# Altium PCB PressureTransducer.PcbDoc
Units mil, origin at the board's own origin, x right, y up, seen from the top; angles counter-clockwise.
Board outline 6000 x 2595 mil, 2 copper layers (Top Layer, Bottom Layer); 66 components, 37 nets, 268 pads, 45 vias.
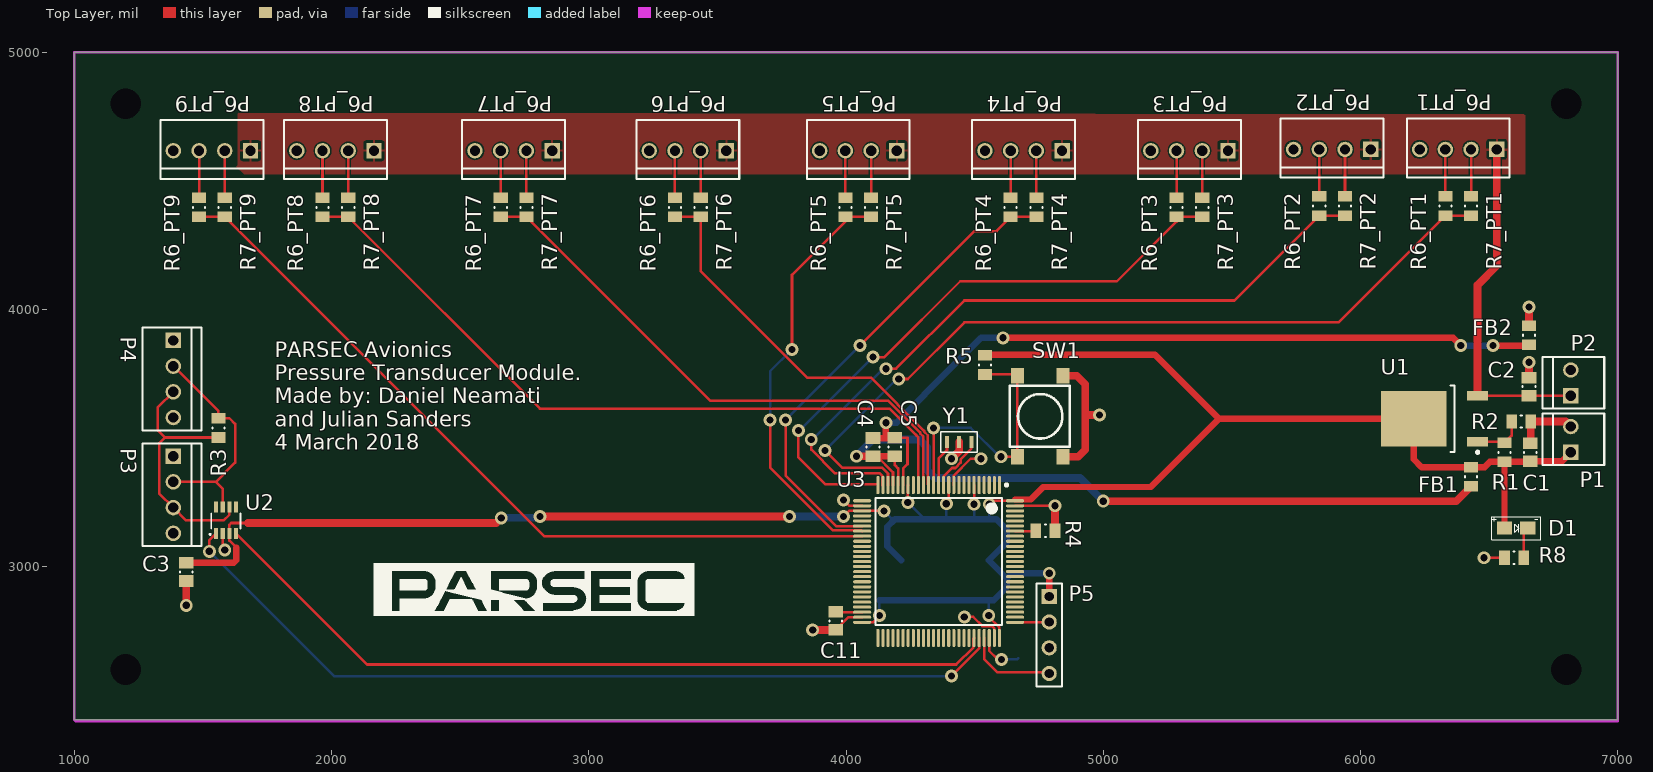
[diagram p0: Top Layer view]
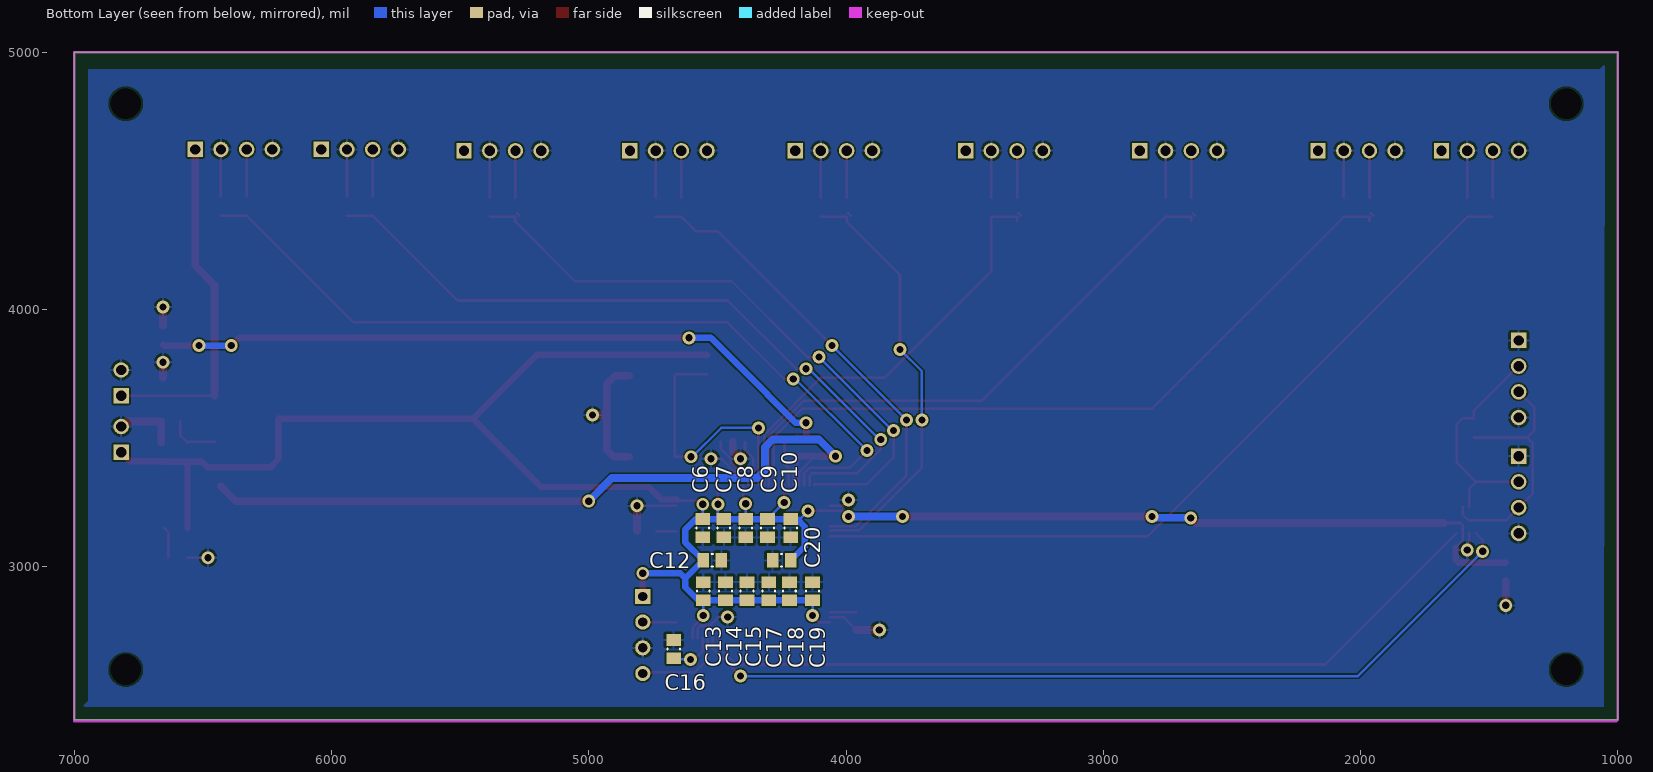
[diagram p1: Bottom Layer view, seen from below]
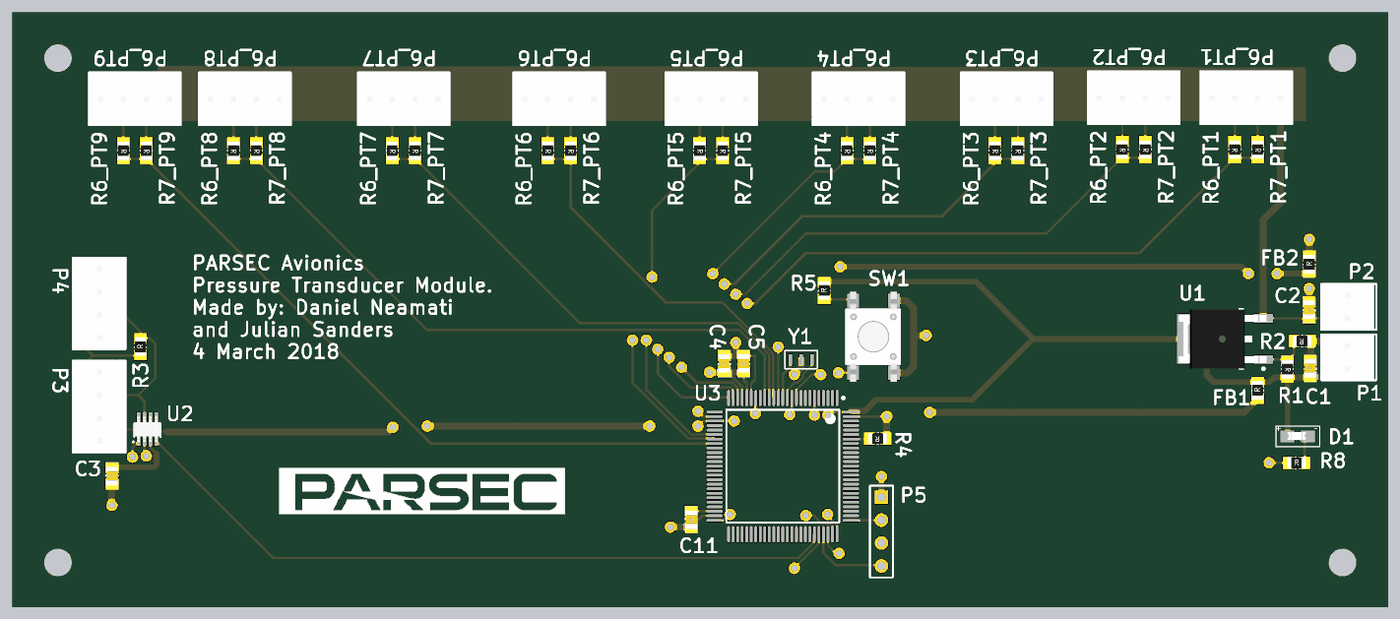
[diagram p2: 3D render of the assembled board from above, using the file's embedded part models]
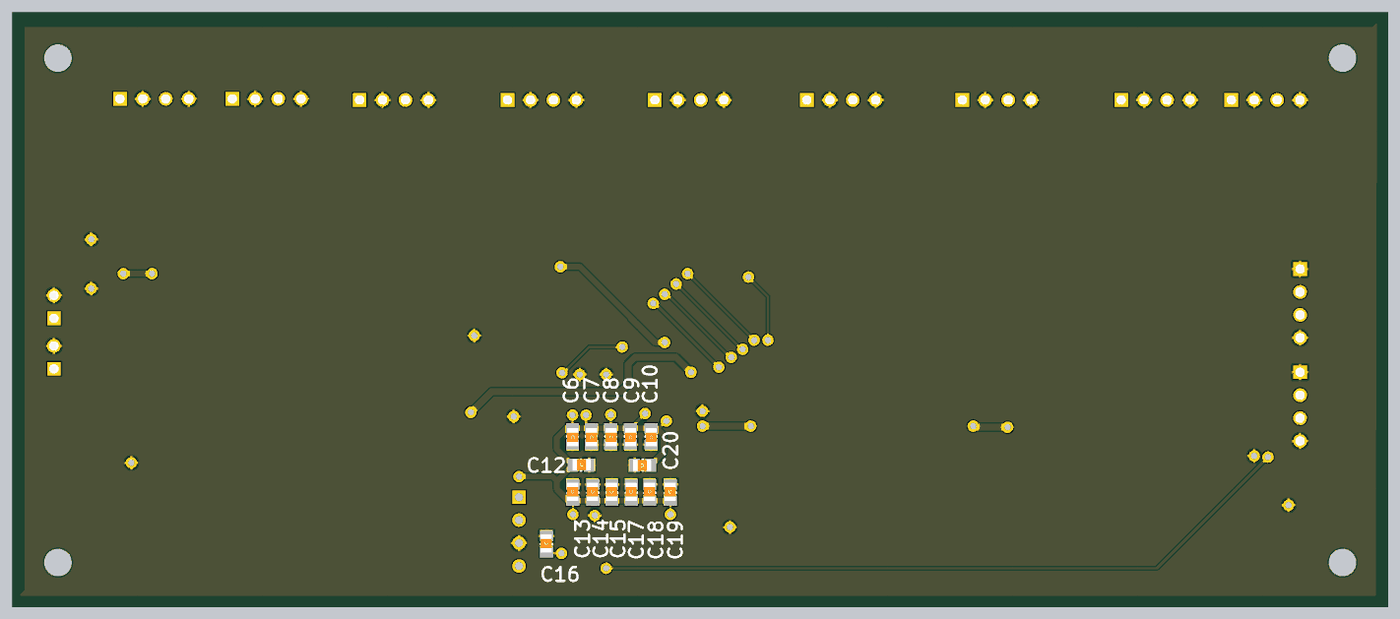
[diagram p3: 3D render of the assembled board from below, using the file's embedded part models]

## Layer stack, top to bottom
Top Solder: solder mask 0.4, Solder Resist, Dk 3.5
Top Layer: signal copper 1.4
Dielectric 1: dielectric 12.6, FR-4, Dk 4.8
Bottom Layer: signal copper 1.4
Bottom Solder: solder mask 0.4, Solder Resist, Dk 3.5

## Board outline
1000,2405 7000,2405 7000,5000 1000,5000

## Design rules (kind name [scope] priority, off if disabled: settings)
Clearance [All] p1: gap=6 ignorepadtopadclearanceinfootprint=FALSE
HoleSize [All] p1: absolutevalues=TRUE maxlimit=250 minlimit=1 maxpercent=80.000 minpercent=20.000
MinimumSolderMaskSliver [All] p1: minsoldermaskwidth=0
PolygonConnect [All] p1: connectstyle=Relief reliefconductorwidth=10 reliefentries=4 polygonreliefangle="90 Angle" airgapwidth=10
RoomDefinition Micro_Schematic [InComponentClass('Micro_Schematic')] p1: confinementstyle=ConfineIn formatcopy=TRUE lockcomponents=FALSE outline 1130,3975 1130,2480 5041.49,2480 5041.49,3975
RoomDefinition U_Power [InComponentClass('U_Power')] p2: confinementstyle=ConfineIn formatcopy=TRUE lockcomponents=FALSE outline 6042.68,2935 6957.44,2935 6957.44,3985 6042.68,3985
RoomDefinition PT9 [InComponentClass('PT9')] p3: confinementstyle=ConfineIn formatcopy=TRUE lockcomponents=FALSE outline 1740,4127.4 1740,4862.4 1315,4862.4 1315,4127.4
RoomDefinition PT8 [InComponentClass('PT8')] p4: confinementstyle=ConfineIn formatcopy=TRUE lockcomponents=FALSE outline 2220,4127.4 2220,4862.4 1795,4862.4 1795,4127.4
RoomDefinition PT7 [InComponentClass('PT7')] p5: confinementstyle=ConfineIn formatcopy=TRUE lockcomponents=FALSE outline 2912.6,4127.4 2912.6,4862.4 2487.6,4862.4 2487.6,4127.4
RoomDefinition PT6 [InComponentClass('PT6')] p6: confinementstyle=ConfineIn formatcopy=TRUE lockcomponents=FALSE outline 3590,4127.4 3590,4862.4 3165,4862.4 3165,4127.4
RoomDefinition PT5 [InComponentClass('PT5')] p7: confinementstyle=ConfineIn formatcopy=TRUE lockcomponents=FALSE outline 4252.6,4127.4 4252.6,4862.4 3827.6,4862.4 3827.6,4127.4
RoomDefinition PT4 [InComponentClass('PT4')] p8: confinementstyle=ConfineIn formatcopy=TRUE lockcomponents=FALSE outline 4895,4127.4 4895,4862.4 4470,4862.4 4470,4127.4
RoomDefinition PT3 [InComponentClass('PT3')] p9: confinementstyle=ConfineIn formatcopy=TRUE lockcomponents=FALSE outline 5540,4127.4 5540,4862.4 5115,4862.4 5115,4127.4
RoomDefinition PT2 [InComponentClass('PT2')] p10: confinementstyle=ConfineIn formatcopy=TRUE lockcomponents=FALSE outline 6095,4132.4 6095,4867.4 5670,4867.4 5670,4132.4
RoomDefinition PT1 [InComponentClass('PT1')] p11: confinementstyle=ConfineIn formatcopy=TRUE lockcomponents=FALSE outline 6585,4132.4 6585,4867.4 6160,4867.4 6160,4132.4
RoutingVias [All] p1: holewidth=28 width=50 viastyle="Through Hole" minholewidth=28 minwidth=50 maxholewidth=28 maxwidth=50
SilkToSilkClearance [All] p1: silktosilkclearance=5
SilkToSolderMaskClearance [IsPad] p1: minsilkscreentomaskgap=1 clearancetoexposedcopper=TRUE
SolderMaskExpansion [All] p1: expansion=4
Width [All] p1: maxlimit=100 minlimit=6 preferedwidth=10
26 further rules are at their usual default settings.

## Classes and differential pairs
channel class Pressure_Transducer: PT1 PT2 PT3 PT4 PT5 PT6 PT7 PT8 PT9
component class U_Power: C1 C2 D1 FB1 FB2 P1 P2 R1 R2 R8 U1
component class PT9: P6_PT9 R6_PT9 R7_PT9
component class PT8: P6_PT8 R6_PT8 R7_PT8
component class PT7: P6_PT7 R6_PT7 R7_PT7
component class PT6: P6_PT6 R6_PT6 R7_PT6
component class PT5: P6_PT5 R6_PT5 R7_PT5
component class PT4: P6_PT4 R6_PT4 R7_PT4
component class PT3: P6_PT3 R6_PT3 R7_PT3
component class PT2: P6_PT2 R6_PT2 R7_PT2
component class PT1: P6_PT1 R6_PT1 R7_PT1
component class Micro_Schematic: C3 C4 C5 C6 C7 C8 C9 C10 C11 C12 C13 C14 C15 C16 C17 C18 C19 C20 P3 P4 P5 R3 R4 R5 SW1 U2 U3 Y1

## Components (designator, comment, footprint, x,y, rotation, side; value= is the part's Value field where it differs from the comment)
C1 "1.0uF" C0805 6660,3445 r90 top
C2 "0.1uF" C0805 6655,3700 r90 top
C3 "100n" C0805 1435,2980 r270 top
C4 "100n" C0805 4105,3465 r90 top
C5 "1u" C0805 4190,3465.43 r90 top
C6 "100n" C0805 4556.85,3150 r270 bottom
C7 "100n" C0805 4475,3150 r270 bottom
C8 "100n" C0805 4390,3150 r270 bottom
C9 "100n" C0805 4305,3150 r270 bottom
C10 "4u7" C0805 4215,3150 r270 bottom
C11 "2u2" C0805 3960,2790 r270 top
C12 "100n" C0805 4520,3025 r180 bottom
C13 "100n" C0805 4555,2905 r90 bottom
C14 "100n" C0805 4468.43,2905 r90 bottom
C15 "100n" C0805 4385,2905 r90 bottom
C16 "2u2" C0805 4670,2680 r90 bottom
C17 "100n" C0805 4300,2905 r90 bottom
C18 "100n" C0805 4220,2905 r90 bottom
C19 "100n" C0805 4130,2905 r90 bottom
C20 "100n" C0805 4250,3025 r0 bottom
D1 "LED" 0805LED 6560,3150 r0 top
FB1 "FERRITE" R0805 6430,3350 r90 top
FB2 "FERRITE" R0805 6655,3900 r90 top
P1 "Molex KK 1x2" "Molex KK 2x1" 6817.68,3495 r180 top
P2 "Molex KK 1x2" "Molex KK 2x1" 6817.68,3715 r180 top
P3 "Molex KK 1x4" "Molex KK 4x1" 1385,3230 r0 top
P4 "Molex KK 1x4" "Molex KK 4x1" 1385,3680 r0 top
P5 "Header 4" HDR1X4 4790,2885 r270 top
P6_PT1 "Molex KK 1x4" "Molex KK 4x1" 6330,4622.4 r270 top (schematic designator P6)
P6_PT2 "Molex KK 1x4" "Molex KK 4x1" 5840,4622.4 r270 top (schematic designator P6)
P6_PT3 "Molex KK 1x4" "Molex KK 4x1" 5285,4617.4 r270 top (schematic designator P6)
P6_PT4 "Molex KK 1x4" "Molex KK 4x1" 4640,4617.4 r270 top (schematic designator P6)
P6_PT5 "Molex KK 1x4" "Molex KK 4x1" 3997.6,4617.4 r270 top (schematic designator P6)
P6_PT6 "Molex KK 1x4" "Molex KK 4x1" 3335,4617.4 r270 top (schematic designator P6)
P6_PT7 "Molex KK 1x4" "Molex KK 4x1" 2657.6,4617.4 r270 top (schematic designator P6)
P6_PT8 "Molex KK 1x4" "Molex KK 4x1" 1965,4617.4 r270 top (schematic designator P6)
P6_PT9 "Molex KK 1x4" "Molex KK 4x1" 1485,4617.4 r270 top (schematic designator P6)
R1 "240R" R0805 6560,3445 r270 top
R2 "390R" R0805 6625,3565 r180 top
R3 "120R" R0805 1560,3540 r90 top
R4 "100R" R0805 4775,3140 r180 top
R5 "1k" R0805 4540,3785 r90 top
R6_PT1 "240R" R0805 6330,4402.4 r270 top (schematic designator R6)
R6_PT2 "240R" R0805 5840,4402.4 r270 top (schematic designator R6)
R6_PT3 "240R" R0805 5285,4397.4 r270 top (schematic designator R6)
R6_PT4 "240R" R0805 4640,4397.4 r270 top (schematic designator R6)
R6_PT5 "240R" R0805 3997.6,4397.4 r270 top (schematic designator R6)
R6_PT6 "240R" R0805 3335,4397.4 r270 top (schematic designator R6)
R6_PT7 "240R" R0805 2657.6,4397.4 r270 top (schematic designator R6)
R6_PT8 "240R" R0805 1965,4397.4 r270 top (schematic designator R6)
R6_PT9 "240R" R0805 1485,4397.4 r270 top (schematic designator R6)
R7_PT1 "464R" R0805 6430,4402.4 r270 top (schematic designator R7)
R7_PT2 "464R" R0805 5940,4402.4 r270 top (schematic designator R7)
R7_PT3 "464R" R0805 5385,4397.4 r270 top (schematic designator R7)
R7_PT4 "464R" R0805 4740,4397.4 r270 top (schematic designator R7)
R7_PT5 "464R" R0805 4097.6,4397.4 r270 top (schematic designator R7)
R7_PT6 "464R" R0805 3435,4397.4 r270 top (schematic designator R7)
R7_PT7 "464R" R0805 2757.6,4397.4 r270 top (schematic designator R7)
R7_PT8 "464R" R0805 2065,4397.4 r270 top (schematic designator R7)
R7_PT9 "464R" R0805 1585,4397.4 r270 top (schematic designator R7)
R8 "1k" R0805 6597.4,3035 r0 top
SW1 "Push Switch" PUSHBUTTON 4755,3585 r90 top
U1 "LM317" D-PAK 6287.68,3575.24 r180 top
U2 "TCAN332DCNT" SOT-23-8 1590,3181.18 r0 top
U3 "MC-ARM-STM32F446-LQFP100" STM-LQFP100_N 4360,3020.43 r270 top
Y1 "CSTCE8M00" "8MHz Ceramic Resonator" 4392.76,3485 r0 top

## Footprints (in the part's own frame and the unit in brackets; to place one, negate y for a bottom-side part, rotate by r counter-clockwise, add the part's x,y. Pads: shape width x height; smd on the part's side, far side on the other; paste and mask are expansions set on the pad)
"8MHz Ceramic Resonator" [mm] "8MHz Ceramic Resonator Murata"
  rect 0.4x1.2 smd: 1(0,0) 2(1.2,0) 3(2.4,0)
  silkscreen extent -0.6,-1 3,1
0805LED [mil]
  rect 60x50 smd: A(0,0) K(90,0)
  silkscreen extent -50,-45 140,45, body extent -1,-16 81,20, height 33
C0805 [mm] "Chip Capacitor, Body 2.0x1.2mm, Height 0.75mm, IPC Medium Density"
  rect 1.15x1.45 smd: 1(-0.9,0) 2(0.9,0)
  silkscreen extent -0.05,-0.62 0.05,0.63, body extent -1.42,-0.67 1.58,0.73, height 0.93
D-PAK [mm] "D-PAK, 4-Leads, Body 6.1x6.5mm, Pitch 2.28mm, Lead Span 9.7mm, IPC Medium Density"
  rect 2.1x0.95 smd: 1(-4.25,2.28) 3(-4.25,-2.28)
  rect 6.5x5.5 smd: 4(2.05,0)
  silkscreen extent -4.38,-3.3 -1.6,3.43, body extent -4.6,-3.28 5.1,3.3, height 2.3
HDR1X4 [mm] "Connector; Header; 4 Position"
  rect 1.5x1.5 hole 0.9: 1(0,0)
  round 1.5 hole 0.9: 2(2.54,0) 3(5.08,0) 4(7.62,0)
  silkscreen extent -1.27,-1.27 8.89,1.27
"Molex KK 2x1" [mil]
  rect 60x60 hole 40: 1(0,50)
  round 60 hole 40: 2(0,-50)
  silkscreen extent -130,-100 110,100, body extent -120,-100 110,100, height 458
"Molex KK 4x1" [mil]
  rect 60x60 hole 40: 1(0,200)
  round 60 hole 40: 2(0,100) 3(0,0) 4(0,-100)
  silkscreen extent -120,-150 110,250, body extent -120,-150 110,250, height 458
PUSHBUTTON [mm]
  rect 1.55x1.3 smd: 1(-4,2.25) 1(4,2.25) 2(-4,-2.25) 2(4,-2.25)
  silkscreen extent -3,-2.9 3,3, body extent -5,-3 5,3, height 5.12
R0805 [mm] "Chip Resistor, Body 2.0x1.3mm, IPC Medium Density"
  rect 1.05x1.4 smd: 1(-0.95,0) 2(0.95,0)
  silkscreen extent -0.05,-0.6 0.05,0.6, body extent -1.46,-0.7 1.54,0.7, height 0.53
SOT-23-8 [mm] "SOT-23-8"
  rect 0.4x1.1 smd: 1(-0.975,-1.3) 2(-0.325,-1.3) 3(0.325,-1.3) 4(0.975,-1.3) 5(0.975,1.3) 6(0.325,1.3) 7(-0.325,1.3) 8(-0.975,1.3)
  silkscreen extent -1.65,-1.48 1.44,0.65, body extent -1.5,-1.4 1.5,1.4, height 1.11
STM-LQFP100_N [mm] "Thin QFP, 100-Leads, Body 14x14mm, Pitch 0.5mm, IPC Medium Density"
  oval 1.8x0.3 smd: 1(-7.55,6) 2(-7.55,5.5) 3(-7.55,5) 4(-7.55,4.5) 5(-7.55,4) 6(-7.55,3.5) 7(-7.55,3) 8(-7.55,2.5) 9(-7.55,2) 10(-7.55,1.5) 11(-7.55,1) 12(-7.55,0.5) 13(-7.55,0) 14(-7.55,-0.5) 15(-7.55,-1) 16(-7.55,-1.5) 17(-7.55,-2) 18(-7.55,-2.5) 19(-7.55,-3) 20(-7.55,-3.5) 21(-7.55,-4) 22(-7.55,-4.5) 23(-7.55,-5) 24(-7.55,-5.5) 25(-7.55,-6) 51(7.55,-6) 52(7.55,-5.5) 53(7.55,-5) 54(7.55,-4.5) 55(7.55,-4) 56(7.55,-3.5) 57(7.55,-3) 58(7.55,-2.5) 59(7.55,-2) 60(7.55,-1.5) 61(7.55,-1) 62(7.55,-0.5) 63(7.55,0) 64(7.55,0.5) 65(7.55,1) 66(7.55,1.5) 67(7.55,2) 68(7.55,2.5) 69(7.55,3) 70(7.55,3.5) 71(7.55,4) 72(7.55,4.5) 73(7.55,5) 74(7.55,5.5) 75(7.55,6)
  oval 0.3x1.8 smd: 26(-6,-7.55) 27(-5.5,-7.55) 28(-5,-7.55) 29(-4.5,-7.55) 30(-4,-7.55) 31(-3.5,-7.55) 32(-3,-7.55) 33(-2.5,-7.55) 34(-2,-7.55) 35(-1.5,-7.55) 36(-1,-7.55) 37(-0.5,-7.55) 38(0,-7.55) 39(0.5,-7.55) 40(1,-7.55) 41(1.5,-7.55) 42(2,-7.55) 43(2.5,-7.55) 44(3,-7.55) 45(3.5,-7.55) 46(4,-7.55) 47(4.5,-7.55) 48(5,-7.55) 49(5.5,-7.55) 50(6,-7.55) 76(6,7.55) 77(5.5,7.55) 78(5,7.55) 79(4.5,7.55) 80(4,7.55) 81(3.5,7.55) 82(3,7.55) 83(2.5,7.55) 84(2,7.55) 85(1.5,7.55) 86(1,7.55) 87(0.5,7.55) 88(0,7.55) 89(-0.5,7.55) 90(-1,7.55) 91(-1.5,7.55) 92(-2,7.55) 93(-2.5,7.55) 94(-3,7.55) 95(-3.5,7.55) 96(-4,7.55) 97(-4.5,7.55) 98(-5,7.55) 99(-5.5,7.55) 100(-6,7.55)
  silkscreen extent -7.67,-6.25 6.25,6.83, body extent -7,-7 7,7, height 1.6

## Part data
C1 C2 C3 C4 C5 C6 C7 C8 C9 C10 C11 C12 C13 C14 C15 C16 C17 C18 C19 C20: library part C0805, "0805 Capacitor"
D1: Manufacturer="OSRAM Opto Semiconductors Inc", Manufacturer Part Number="LS T676-Q1R2-1-Z", Reel=D13
FB1 FB2: "FERRITE BEAD 0805"
P1 P2: "1x2 Molex KK Connector"
P3 P4 P6_PT1 P6_PT2 P6_PT3 P6_PT4 P6_PT5 P6_PT6 P6_PT7 P6_PT8 P6_PT9: "1x4 Molex KK Connector"
P5: "Header, 4-Pin", LatestRevisionDate=17-Jul-2002, LatestRevisionNote="Re-released for DXP Platform.", Publisher="Altium Limited"
R1 R2 R3 R4 R5 R6_PT1 R6_PT2 R6_PT3 R6_PT4 R6_PT5 R6_PT6 R6_PT7 R6_PT8 R6_PT9 R7_PT1 R7_PT2 R7_PT3 R7_PT4 R7_PT5 R7_PT6 R7_PT7 R7_PT8 R7_PT9 R8: library part R0805, "RESISTOR 0805"
SW1: library part PUSHBUTTON
U1: "Linear Voltage Regulator"
U2: "IC TXRX CAN 3.3V SOT23-8"
Y1: "8MHz Ceramic Resonator"

## Free pads (board coordinates)
  round 60 hole 120: 2(1200,4800) 3(1200,2600) 4(6800,2600) 5(6800,4800)

## Via types
v1: diameter 50, hole 28, Top Layer to Bottom Layer, 45 vias

## Nets (pads, with @x,y where several pads share a name; then routed paths per layer and width w, separated by ;. In a path a pad name is that pad's centre, name@x,y a point inside that pad or via, vN(x,y) a via of type N, cw(c..) or ccw(c..) an arc to the next point about the centre after c; other vN are vias at no path point)
3V3_AVDD: C4.1 C5.1 FB1.1 U3.21 U3.22 | length 2997.7
  Top Layer w10: C4.1 4120.43,3429.57 4182.83,3367.17 U3.22 ; C5.1@4189.57,3429.57 C5.1 4190,3395 4202.52,3382.48 U3.21
  Top Layer w25: C4.1@4120.43,3429.57 C5.1@4189.57,3429.57
  Top Layer w30: v1(4040.43,3429.57) C4.1 ; v1(5000,3255) 6372.4,3255 FB1.1
  Bottom Layer w30: v1(4040.43,3429.57) 4105.87,3495 4285,3495 4315,3465 4315,3375 4345,3345 4910,3345 v1(5000,3255)
3V3_DVDD: C1.1 C3.1 C6.1 C7.1 C8.1 C9.1 C10.1 C12.1 C13.1 C14.1 C15.1 C17.1 C18.1 C19.1 C20.1 D1.A FB1.2 P1.1 P5.1 R1.2 R5.2 U1.4 U2.3 U3.6 U3.11 U3.19 U3.28 U3.50 U3.75 U3.100 | length 9329.5
  Top Layer w10: 1630,3075 1602.8,3102.2 U2.3 1602.8,3162.8 1610,3170 1675,3170 ; 2640,3170 v1(2660,3190) ; v1(3990,3195) 4012.28,3217.28 U3.28 v1(4147.72,3217.28) ; U3.50 4104.21,2784.21 v1(4130,2810) ; v1(4240.43,3250) 4240.43,3316.22 U3.19 ; v1(4390,3245) 4399.37,3254.37 U3.11 ; v1(4497.8,3243.07) U3.6 ; v1(4555,2810) 4555,2805 4596.22,2763.78 U3.75 ; v1(4556.85,3243.15) 4570.35,3256.65 U3.100
  Top Layer w25: C3.1 1620.43,3015.43 1630,3025 1630,3075 ; R5.2 4542.6,3825 5200.47,3825 5450.24,3575.24 ; U3.100@4657.24,3261.37 4717.89,3261.37 4766.52,3310 5185,3310 5450.24,3575.24 ; P5.1 v1(4790,2975) ; D1.A R1.2 ; P1.1 6782.24,3409.57 C1.1 6658.03,3407.6 R1.2 ; 5450.24,3575.24 U1.4 6206.97,3418.03 6237.6,3387.4 FB1.2 6482.4,3387.4 6502.6,3407.6 R1.2
  Top Layer w30: 1675,3170 2640,3170 ; v1(2810,3195) v1(3780,3195)
  Bottom Layer w10: v1@2805,3190 v1(2810,3195) ; v1(4130,2810) C19.1 ; v1(4147.72,3217.28) 4179.57,3185.43 C10.1@4190.43,3185.43 ; v1(4240.43,3250) C9.1 ; C8.1 v1(4390,3245) ; C7.1@4495,3186.3 4497.8,3189.09 v1(4497.8,3243.07) ; v1(4555,2810) C13.1 ; C6.1 v1(4556.85,3243.15)
  Bottom Layer w25: C19.1 C18.1 C17.1 C15.1 C14.1 C13.1 4574.57,2869.57 4625,2920 4625,2955.43 ; C20.1 4160,3079.57 4160,3155 4190.43,3185.43 C10.1 C9.1 C8.1 C7.1 C6.1 4584.57,3185.43 4625,3145 4625,3094.57 C12.1 4625,2955.43 ; v1(4790,2975) 4644.57,2975 4625,2955.43
  Bottom Layer w30: v1(2660,3190) v1@2805,3190 ; v1(3780,3195) v1(3990,3195)
AGND: C4.2 C5.2 FB2.1 U3.20 | length 3035.2
  Top Layer w10: C5.2 4239.13,3500.87 4239.13,3399.13 4222.2,3382.2 U3.20
  Top Layer w25: C4.2 4155,3500.43 ; v1(4155,3560) 4155,3500.43 ; C5.2 4189.57,3500.43 4155,3500.43 ; v1(4610,3890) 6360,3890 v1(6390,3860) ; v1(6515,3860) 6652.4,3860 FB2.1
  Bottom Layer w25: v1(4155,3560) 4196.52,3560 4303.5,3666.98 4303.5,3668.5 4525,3890 v1(4610,3890) ; v1(6390,3860) v1(6515,3860)
CAN_RX: U2.4 U3.70 | length 3143.2
  Top Layer w10: U2.4 2138.39,2620 4428.36,2620 4495.02,2686.66 4495.02,2720.41 U3.70
CAN_TX: U2.1 U3.71 | length 3359.6
  Top Layer w10: v1(1525,3060) 1525,3103.39 U2.1 ; v1(4410,2575) 4517.48,2682.48 U3.71
  Bottom Layer w10: v1(1525,3060) 2010,2575 v1(4410,2575)
CANH: P3.2 P4.2 R3.2 U2.7 | length 879.3
  Top Layer w10: P3.2 1550,3330 ; P4.2 1560,3605 R3.2 1602.6,3577.4 1625,3555 1625,3405 1550,3330 ; U2.7 1577.2,3302.8 1550,3330
CANL: P3.3 P4.3 R3.1 U2.6 | length 1003.5
  Top Layer w10: P4.3 1325.2,3620.2 1325.2,3530 1352.6,3502.6 ; R3.1 1352.6,3502.6 ; U2.6 1602.8,3202.2 1580.59,3180 1435,3180 P3.3 1330,3285 1330,3480 1352.6,3502.6
DGND: C1.2 C2.2 C3.2 C6.2 C7.2 C8.2 C9.2 C10.2 C11.2 C12.2 C13.2 C14.2 C15.2 C16.2 C17.2 C18.2 C19.2 C20.2 FB2.2 P1.2 P2.2 P3.1 P3.4 P4.1 P4.4 P5.3 P6_PT1.2 P6_PT1.4 P6_PT2.2 P6_PT2.4 P6_PT3.2 P6_PT3.4 P6_PT4.2 P6_PT4.4 P6_PT5.2 P6_PT5.4 P6_PT6.2 P6_PT6.4 P6_PT7.2 P6_PT7.4 P6_PT8.2 P6_PT8.4 P6_PT9.2 P6_PT9.4 R2.1 R4.1 R7_PT1.1 R7_PT2.1 R7_PT3.1 R7_PT4.1 R7_PT5.1 R7_PT6.1 R7_PT7.1 R7_PT8.1 R7_PT9.1 R8.1 SW1.2 U2.2 U3.10 U3.27 U3.49 U3.74 U3.99 Y1.2 | length 3743.3
  Top Layer w10: U2.2 1577.2,3087.2 1585,3079.41 v1(1585,3065) ; R7_PT9.1 P6_PT9.2 ; R7_PT8.1 P6_PT8.2 ; R7_PT7.1 P6_PT7.2 ; R7_PT6.1 P6_PT6.2 ; C11.2 4010,2804.57 4062.09,2804.57 U3.49 ; v1(3990,3260) 4013.03,3236.97 U3.27 ; R7_PT5.1 P6_PT5.2 ; U3.10 4419.06,3354.05 4485,3420 v1(4525,3420) ; v1(4460,2805) 4494.72,2805 4530.1,2769.62 4567.75,2769.62 4576.54,2760.84 U3.74 ; U3.99 v1(4813.03,3236.97) ; R7_PT4.1 P6_PT4.2 ; R7_PT3.1 P6_PT3.2 ; R7_PT2.1 P6_PT2.2 ; R7_PT1.1 P6_PT1.2 ; v1(6480,3035) R8.1 ; C1.2 C1.2@6662.4,3482.83
  Top Layer w30: v1(1435,2850) C3.2 ; v1(3870.43,2754.57) C11.2 ; v1(4410,3420) 4440,3450 Y1.2 ; R4.1 4812.4,3236.34 v1(4813.03,3236.97) ; SW1.2@4843.58,3427.52 4902.52,3427.52 4930,3455 4930,3590 ; SW1.2@4843.58,3742.48 4897.52,3742.48 4930,3710 4930,3590 ; v1(4985,3590) 4930,3590 ; C2.2 v1(6655,3795) ; FB2.2 v1(6655,4010) ; C1.2@6662.4,3482.83 R2.1 6797.68,3565 P1.2
NetC11_1: C11.1 U3.48 | length 103.5
  Top Layer w10: C11.1 3961.85,2823.58 U3.48
NetC16_1: C16.1 U3.73 | length 178.8
  Top Layer w10: U3.73 4556.85,2673.15 4590,2640 v1(4605,2640)
  Bottom Layer w10: v1(4605,2640) 4665.43,2640 C16.1
NetD1_K: D1.K R8.2 | length 121.3
  Top Layer w10: R8.2 6634.8,3134.8 D1.K
NetP6_PT1_3: P6_PT1.3 R6_PT1.1 | length 182.6
  Top Layer w10: R6_PT1.1 P6_PT1.3
NetP6_PT2_3: P6_PT2.3 R6_PT2.1 | length 182.6
  Top Layer w10: R6_PT2.1 P6_PT2.3
NetP6_PT3_3: P6_PT3.3 R6_PT3.1 | length 182.6
  Top Layer w10: R6_PT3.1 P6_PT3.3
NetP6_PT4_3: P6_PT4.3 R6_PT4.1 | length 182.6
  Top Layer w10: R6_PT4.1 P6_PT4.3
NetP6_PT5_3: P6_PT5.3 R6_PT5.1 | length 182.6
  Top Layer w10: R6_PT5.1 P6_PT5.3
NetP6_PT6_3: P6_PT6.3 R6_PT6.1 | length 182.6
  Top Layer w10: R6_PT6.1 P6_PT6.3
NetP6_PT7_3: P6_PT7.3 R6_PT7.1 | length 182.6
  Top Layer w10: R6_PT7.1 P6_PT7.3
NetP6_PT8_3: P6_PT8.3 R6_PT8.1 | length 182.6
  Top Layer w10: R6_PT8.1 P6_PT8.3
NetP6_PT9_3: P6_PT9.3 R6_PT9.1 | length 182.6
  Top Layer w10: R6_PT9.1 P6_PT9.3
NetR1_1: R1.1 R2.2 U1.1 | length 200.3
  Top Layer w10: U1.1 6556.93,3485.47 R1.1 6587.6,3510 R2.2
NetR4_2: R4.2 U3.94 | length 81
  Top Layer w10: U3.94 4736.14,3138.54 R4.2
NetR5_1: R5.1 SW1.1 U3.14 | length 1041.5
  Top Layer w10: U3.14@4340,3317.99 U3.14 4340.31,3539.69 v1(4340,3540) ; R5.1 4661.3,3747.6 4666.42,3742.48 4666.42,3427.52 v1(4602.52,3427.52)
  Bottom Layer w10: v1(4340,3540) 4485,3540 4600,3425 v1(4602.52,3427.52)
NetR6_PT1_2: R6_PT1.2 R7_PT1.2 U3.23 | length 3246.8
  Top Layer w10: v1@3915,3470 3918.87,3466.13 v1(3918.87,3452.04) 3918.87,3451.13 3985,3385 4140,3385 4163.15,3361.85 U3.23 ; v1(4205,3730) 4240,3730 4460,3950 5915,3950 R6_PT1.2 R7_PT1.2
  Bottom Layer w10: v1(3918.87,3452.04) 4205,3738.18 v1(4205,3730)
NetR6_PT2_2: R6_PT2.2 R7_PT2.2 U3.24 | length 2907
  Top Layer w10: v1(3865,3495) 3865,3455 3955.89,3364.11 4130.78,3364.11 4140.68,3354.21 4140.68,3317.68 U3.24 ; v1(4155,3770) 4195,3770 4460,4035 5510,4035 R6_PT2.2 R7_PT2.2
  Bottom Layer w10: v1(3865,3495) 3865,3490.91 v1@3867.5,3488.41 ; v1@3867.5,3478.41 v1@3867.5,3488.41 ; v1(4155,3770) 4175.91,3770 4160.46,3785.46 3867.5,3492.5 v1@3867.5,3488.41
NetR6_PT3_2: R6_PT3.2 R7_PT3.2 U3.25 | length 2395.8
  Top Layer w10: v1(3815,3530) 3815,3425 3918.78,3321.22 4123.78,3321.22 U3.25 ; v1(4105,3815) 4149.09,3815 4444.09,4110 5053,4110 R6_PT3.2@5285,4342 ; R6_PT3.2@5270,4365 R6_PT3.2@5280,4375 ; R6_PT3.2@5285,4345 R6_PT3.2 R7_PT3.2
  Bottom Layer w10: v1(3815,3530) 3816,3531 3821,3531 v1(4105,3815)
NetR6_PT4_2: R6_PT4.2 R7_PT4.2 U3.31 | length 1896.5
  Top Layer w10: v1(3765,3570) 3765,3355 3961.77,3158.23 U3.31 ; v1(4055,3860) 4500,4305 4585,4305 R6_PT4.2 R7_PT4.2
  Bottom Layer w10: v1(3765,3570) v1(4055,3860)
NetR6_PT5_2: R6_PT5.2 R7_PT5.2 U3.32 | length 1667.8
  Top Layer w10: v1(3705,3570) 3705,3385 3948.68,3141.32 4059.98,3141.32 U3.32 ; v1(3790,3845) 3790,4135 R6_PT5.2@3997.6,4342.6 ; R6_PT5.2@3982.6,4365 R6_PT5.2@3992.6,4375 ; R6_PT5.2@3997.6,4345 R6_PT5.2 R7_PT5.2
  Bottom Layer w10: v1(3705,3570) 3705,3760 v1(3790,3845)
NetR6_PT6_2: R6_PT6.2 R7_PT6.2 U3.15 | length 1683.9
  Top Layer w10: R6_PT6.2@3320,4365 R6_PT6.2@3330,4375 ; R6_PT6.2@3335,4345 R6_PT6.2 R7_PT6.2 3435,4149.09 3849.09,3735 4097.63,3735 4304,3528.63 4304,3525.09 4317.85,3511.24 4317.85,3320.46 U3.15
NetR6_PT7_2: R6_PT7.2 R7_PT7.2 U3.16 | length 2216.3
  Top Layer w10: R6_PT7.2@2642.6,4365 R6_PT7.2@2652.6,4375 ; R6_PT7.2@2657.6,4345 R6_PT7.2 R7_PT7.2 3472.6,3645 4165,3645 4288,3522 4288,3518.46 4300.94,3505.52 U3.16
NetR6_PT8_2: R6_PT8.2 R7_PT8.2 U3.17 | length 2886.1
  Top Layer w10: R6_PT8.2@1950,4365 R6_PT8.2@1960,4375 ; R6_PT8.2@1965,4345 R6_PT8.2 R7_PT8.2 2810,3615 4170,3615 4272,3513 4272,3511.83 4281.26,3502.57 U3.17
NetR6_PT9_2: R6_PT9.2 R7_PT9.2 U3.33 | length 3091.9
  Top Layer w10: R6_PT9.2 R7_PT9.2 2826.14,3118.86 U3.33
NetU3_12: U3.12 Y1.3 | length 219.3
  Top Layer w10: U3.12 4379.68,3351.43 4412.26,3384 4424.91,3384 4446,3405.09 4446,3417.74 4487.24,3458.99 Y1.3
NetU3_13: U3.13 Y1.1 | length 180.9
  Top Layer w10: U3.13 4360,3420.91 4392.76,3453.67 Y1.1
SWCLK: P5.2 U3.76 | length 133.1
  Top Layer w10: U3.76 4789.21,2784.21 P5.2
SWDIO: P5.4 U3.72 | length 357.7
  Top Layer w10: U3.72 4537.17,2641.92 4589.76,2589.33 4785.67,2589.33 P5.4
VIN_12V: C2.1 P2.1 P6_PT1.1 P6_PT2.1 P6_PT3.1 P6_PT4.1 P6_PT5.1 P6_PT6.1 P6_PT7.1 P6_PT8.1 P6_PT9.1 U1.3 | length 1351.5
  Top Layer w10: U1.3 6654.57,3665 C2.1 6655.43,3665 P2.1
  Top Layer w30: U1.3 6455,4095 6530,4170 P6_PT1.1
pads on no net: U2.5 U2.8 U3.1 U3.2 U3.3 U3.4 U3.5 U3.7 U3.8 U3.9 U3.18 U3.26 U3.29 U3.30 U3.34 U3.35 U3.36 U3.37 U3.38 U3.39 U3.40 U3.41 U3.42 U3.43 U3.44 U3.45 U3.46 U3.47 U3.51 U3.52 U3.53 U3.54 U3.55 U3.56 U3.57 U3.58 U3.59 U3.60 U3.61 U3.62 U3.63 U3.64 U3.65 U3.66 U3.67 U3.68 U3.69 U3.77 U3.78 U3.79 U3.80 U3.81 U3.82 U3.83 U3.84 U3.85 U3.86 U3.87 U3.88 U3.89 U3.90 U3.91 U3.92 U3.93 U3.95 U3.96 U3.97 U3.98

## Polygon pours and split planes (outlines as drawn)
DGND on Bottom Layer "Bottom Layer - DGND" (solid, pour order 4): 1050,4955 1070,4935 6945,4935 6945,2480 6965,2460 6960,2455 1055,2455
VIN_12V on Top Layer "Top Layer VIN-12" (solid, pour order 6): 1635,4765 1635,4560 1630,4555 1660,4525 6640,4525 6640,4755 6635,4760

## Keep-outs
Keep-Out Layer:
  lines w10: 1000,2405 1005,2400 7000,2400 7000,5000 1000,5000 1000,2405

## Silkscreen, mask and mechanical layers (free items; w line width, h text height)
Top Overlay:
  drawing of 1368 lines, arcs and shapes, not listed
  text "PARSEC Avionics  / Pressure Transducer Module. / Made by: Daniel Neamati / and Julian Sanders / 4 March 2018" at 1780,3455 h60